# Allegro board BBear_balance_carv2_0.brd
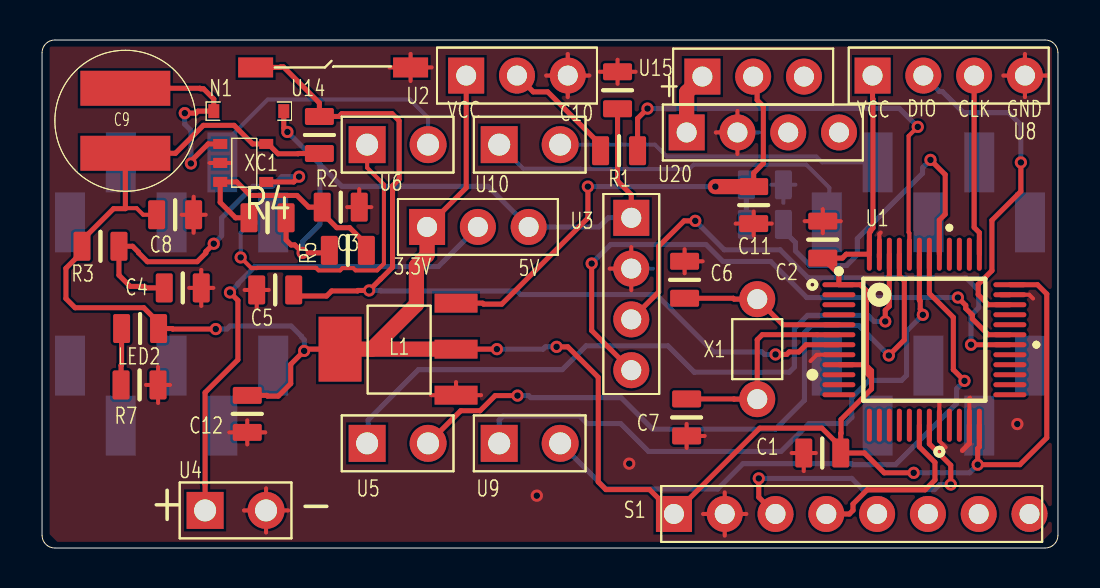
[diagram p0: board, top side]
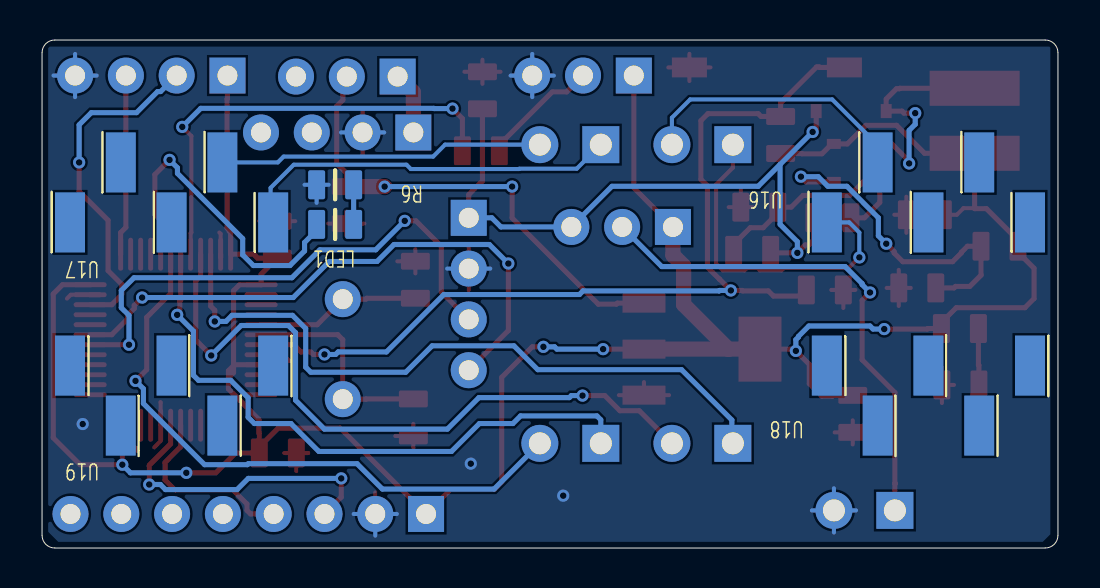
[diagram p1: board, bottom side, seen from below]

Outline 50.8 x 25.4 mm; copper layers: TOP, BOTTOM. Coordinates in mm from the lower left corner of the outline.
Outline path: 0,24.77 arc(0.19,25.21) 0.63,25.4 50.16,25.4 arc(50.61,25.21) 50.8,24.77 50.8,0.63 arc(50.61,0.19) 50.16,0 0.63,0 arc(0.19,0.19) 0,0.63 0,24.77

## Placement (name value [footprint] x y rotation side)
C1  0.1UF  [C-0805]  39.01 4.75 0 top
C2  0.1UF  [C-0805]  39.04 15.42 270 top
C3  CFB1000pF  [C-0805]  15.29 14.88 0 top
C4  CSS0.1uF  [C-0805]  7.04 13 0 top
C5  1UF  [C-0805]  11.66 12.9 0 top
C6  22PF  [C-0805]  32.13 13.41 270 top
C7  22PF  [C-0805]  32.23 6.53 90 top
C8  CIN4.7uF  [C-0805]  6.65 16.66 0 top
C9  L_4.7uH  [CD43]  4.17 21.36 180 top
C10  CL4.7uF  [C-0805]  28.78 22.89 90 top
C11  0.1UF  [C-0805]  35.59 17.14 270 top
C12  10UF  [C-0805]  10.26 6.71 90 top
L1  LM1117  [LM1117_3_3]  20.7 12.24 180 top
LED1  HEARTLED  [C-0805]  36.14 16.18 0 bottom
LED2  POWER  [C-0805]  4.9 10.97 0 top
N1  SD_XBS104S14R  [SOD-123]  10.34 21.84 0 top
R1  10K  [C-0805]  28.85 19.86 0 top
R2  10K  [C-0805]  13.87 20.65 90 top
R3  RSS220K  [C-0805]  2.92 15.09 0 top
R4  RFB1_300K  [C-0805]  11.28 16.51 0 top
R5  RFB2_75K  [C-0805]  14.94 17.04 180 top
R6  1K  [C-0805]  36.14 18.16 0 bottom
R7  1K  [C-0805]  4.88 8.15 0 top
S1  MPU6050  [CON8]  31.6 1.7 90 top
U1  STM32F103C8T6  [NCU100_LQFP_48]  44.12 10.41 0 top
U2  BOOT0  [CON3]  21.21 23.62 90 top
U3  -  [CON4]  29.46 16.51 0 top
U4  CON2  [CON2_R2_54]  8.15 1.88 90 top
U5  CON2  [CON2_R2_54]  16.26 5.23 90 top
U6  MOTOR-A  [CON2_R2_54]  16.26 20.17 90 top
U8  SWD  [CON4]  41.53 23.62 90 top
U9  CON2  [CON2_R2_54]  22.86 5.23 90 top
U10  MOTOR-B  [CON2_R2_54]  22.86 20.17 90 top
U12  switch  [CON3]  19.25 16.05 90 top
U14  CON2  [3_6KEY]  14.55 24.03 0 top
U15  KEY  [CON3]  33.02 23.57 90 top
U16  CON5  [TP2_54_5]  6.48 17.78 270 bottom
U17  CON5  [TP2_54_5]  44.32 17.78 270 bottom
U18  CON5  [TP2_54_5]  6.48 7.62 90 bottom
U19  CON5  [TP2_54_5]  44.32 7.62 90 bottom
U20  -  [CON4]  32.23 20.78 90 top
X1  -  [XTAL]  35.76 7.44 90 top
XC1  -  [XC9119]  10.06 19.25 270 top

## Library data of the parts
C1 C2 C5-C7 C11 C12 = CAP: Tolerance: RichardLC; User Part Number: pn
C3 C4 C8 C10 = CAP NP: Tolerance: RichardLC; User Part Number: pn
C9 = CDRH104R_330uH
L1 = LM1117
LED1 LED2 = LED: Tolerance: RichardLC; User Part Number: pn
N1 = 1N5819
R1-R7 = R: Tolerance: RichardLC; User Part Number: pn
S1 = CON8
U1 = STM32F103C8T6: User Part Number: pn; Tolerance: RichardLC
U2 U12 U15 = CON3
U3 U8 U20 = CON4
U4-U6 U9 U10 U14 = CON2
U16-U19 = CON5
X1 = XTAL
XC1 = XC9119

## Footprints (pads in the part's own frame, mm; a bottom-side part is the same pattern mirrored in y, then rotated)
3_6KEY
  rect 1.75x1 smd: 1(-3.875,0) 2(3.875,0)
C-0805
  custom 0.848x1.448 smd: 1(-0.925,0) 2(0.925,0)
CD43
  rect 4.5x1.75 smd: 1(0,1.625) 2(0,-1.625)
CON2_R2_54
  rect 1.849x1.849 hole 1.1: 1(0,0)
  round 1.849 hole 1.1: 2(0,-3.048)
CON3
  rect 1.8x1.8 hole 1: 1(0,0)
  round 1.8 hole 1: 2(0,-2.54) 3(0,-5.08)
CON4
  rect 1.8x1.8 hole 1: 1(0,0)
  round 1.8 hole 1: 2(0,-2.54) 3(0,-5.08) 4(0,-7.62)
CON8
  rect 1.8x1.8 hole 1: 1(0,0)
  round 1.8 hole 1: 2(0,-2.54) 3(0,-5.08) 4(0,-7.62) 5(0,-10.16) 6(0,-12.7) 7(0,-15.24) 8(0,-17.78)
LM1117_3_3
  rect 2.15x0.95 smd: 1(0,0) 2(0,2.3) 3(0,4.6)
  rect 2.15x3.25 smd: 4(5.8,2.3)
NCU100_LQFP_48
  oval 1.651x0.249 smd: 1(-4.275,2.75) 2(-4.275,2.25) 3(-4.275,1.75) 4(-4.275,1.25) 5(-4.275,0.75) 6(-4.275,0.25) 7(-4.275,-0.25) 8(-4.275,-0.75) 9(-4.275,-1.25) 10(-4.275,-1.75) 11(-4.275,-2.25) 12(-4.275,-2.75) 25(4.275,-2.75) 26(4.275,-2.25) 27(4.275,-1.75) 28(4.275,-1.25) 29(4.275,-0.75) 30(4.275,-0.25) 31(4.275,0.25) 32(4.275,0.75) 33(4.275,1.25) 34(4.275,1.75) 35(4.275,2.25) 36(4.275,2.75)
  oval 0.249x1.651 smd: 13(-2.75,-4.275) 14(-2.25,-4.275) 15(-1.75,-4.275) 16(-1.25,-4.275) 17(-0.75,-4.275) 18(-0.25,-4.275) 19(0.25,-4.275) 20(0.75,-4.275) 21(1.25,-4.275) 22(1.75,-4.275) 23(2.25,-4.275) 24(2.75,-4.275) 37(2.75,4.275) 38(2.25,4.275) 39(1.75,4.275) 40(1.25,4.275) 41(0.75,4.275) 42(0.25,4.275) 43(-0.25,4.275) 44(-0.75,4.275) 45(-1.25,4.275) 46(-1.75,4.275) 47(-2.25,4.275) 48(-2.75,4.275)
SOD-123
  rect 0.55x0.7 smd: 1(-1.75,0) 2(1.75,0)
TP2_54_5
  rect 3x1.5 smd: 1(1.5,5.08) 2(1.5,0) 3(1.5,-5.08) 4(-1.5,2.54) 5(-1.5,-2.54)
XC9119
  rect 0.5x0.7 smd: 1(-0.95,-1.15) 2(0,-1.15) 3(0.95,-1.15) 4(0.95,1.15) 5(-0.95,1.15)
XTAL
  round 1.8 hole 1: 1(0,0) 2(5,0)

## Nets
GND: C1.1 C2.1 C4.2 C5.1 C6.1 C7.1 C8.2 C10.2 C11.2 C12.1 L1.3(GND) R5.1 R6.2 R7.2 S1.2 U1.8(VSSA) U1.20(PB2/BOOT1) U1.23(VSS_1) U1.35(VSS_2) U1.47(VSS_3) U2.3 U3.2 U4.2 U8.4 U14.2 U20.2 XC1.2(VSS)
VCC3.3: C1.2 C2.2 C8.1 C9.1 C12.2 L1.2(OUT2) L1.4(OUT1) LED2.2 R2.1 R3.1 S1.1 U1.1(VBAT) U1.9(VDDA) U1.24(VDD_1) U1.36(VDD_2) U1.48(VDD_3) U2.1 U8.1 U12.1 XC1.5(VDD)
BAT+: U15.1 U20.1
BAT_5V: C3.1 C10.1 N1.2 R4.2 U3.1 U12.3
BOOT0: R1.2 U1.44(BOOT0)
HEART_LED: LED1.2 U1.41(PB5)
LEFT_BACK: U1.43(PB7) U9.1
LEFT_FOR: U1.42(PB6) U9.2
MOTOR_BAT: U4.1 U12.2
MOTORA+: U6.1 U16.3
MOTORA-: U6.2 U16.5
MOTORB+: U10.1 U17.1
MOTORB-: U10.2 U17.4
OSCIN: C6.2 U1.5(OSCIN) X1.2
OSCOUT: C7.2 U1.6(OSCOUT) X1.1
PA9: U1.31(PA10) U3.4
PA10: U1.30(PA9) U3.3
RESET: C5.2 R2.2 U1.7(NRST) U14.1
RIGHT_BACK: U1.46(PB9) U5.1
RIGHT_FOR: U1.45(PB8) U5.2
SCL: S1.3 U1.19(PB1)
SDA: S1.4 U1.18(PB0)
SWCLK: U1.37(SWCLK) U8.3
SWIO: U1.34(SWIO) U8.2
N00802: C11.1 L1.1(VCC-IN) U15.2
N03806: LED2.1 R7.1
N07785: LED1.1 R6.1
N28892: C4.1 R3.2 XC1.4(CE/SS)
N28953: C9.2 N1.1 XC1.1(LX)
N29036: C3.2 R4.1 R5.2 XC1.3(FB)
N073361: R1.1 U2.2

Pads without a net: S1 5 6 7 8; U1 2 3 4 10 11 12 13 14 15 16 17 21 22 25 26 27 28 29 32 33 38 39 40; U15 3; U16 1 2 4; U17 2 3 5; U18 1 2 3 4 5; U19 1 2 3 4 5; U20 3 4

## Via types
v1: diameter 0.61, hole 0.33, TOP to BOTTOM, 36 vias

## Routing (per net, layer and track width the routed paths; a pad name or vN(x,y) marks a point on that pad's centre or on a via; arc(x,y) is an arc through that point)
GND: length 95.8
  TOP w0.203: 25.21,23.62 26.29,23.62 ; 26.29,23.62 27.37,23.62 ; 26.29,23.62 26.29,22.54 ; 26.29,23.62 26.29,24.7 ; C5.1 11.34,12.9 ; C5.1 10.73,12 ; C5.1 10.13,12.9 ; 8.38,19.25 XC1.2 9.44,19.25 ; 32.23,5 C7.1 ; C7.1 32.23,6.21 ; C7.1 33.13,5.6 ; 7.96,12.1 C4.2 ; C4.2 8.56,13 ; C4.2 7.36,13 ; C4.2 7.96,13.91 ; C1.1 38.69,4.75 ; C1.1 37.49,4.75 ; C1.1 38.09,3.85 ; U20.2 34.77,21.86 ; U20.2 34.77,19.7 ; U20.2 33.69,20.78 ; 7.58,15.76 C8.2 ; C8.2 6.98,16.66 ; C8.2 7.58,17.56 ; C8.2 8.18,16.66 ; 17.38,24.03 U14.2 ; U14.2 18.43,23.35 ; U14.2 19.48,24.03 ; U14.2 18.43,24.71 ; 29.46,12.89 U3.2 ; U3.2 28.39,13.97 ; U3.2 29.46,15.05 ; U1.35 49.36,12.66 49.56,12.47 ; U4.2 11.2,2.98 ; U4.2 11.2,0.78 ; U4.2 10.1,1.88 ; U4.2 12.3,1.88 ; 49.15,23.62 49.15,24.7 ; 49.15,23.62 50.23,23.62 ; 49.15,23.62 48.07,23.62 ; 49.15,23.62 49.15,22.54 ; 32.13,13.73 C6.1 ; C6.1 33.03,14.34 ; C6.1 32.13,14.94 ; 35.59,15.62 C11.2 ; C11.2 34.68,16.22 ; C11.2 36.49,16.22 ; C11.2 35.59,16.82 ; 39.04,15.74 C2.1 ; C2.1 39.94,16.34 ; C2.1 38.14,16.34 ; C2.1 39.04,16.95 ; R5.1 15.86,17.95 ; R5.1 16.46,17.04 ; R5.1 15.26,17.04 ; 44.88,7.29 44.87,7.28 U1.20 44.87,5.35 45.19,5.03 ; 41.94,15.77 41.87,15.71 U1.47 ; L1.3 21.95,7.64 ; L1.3 19.45,7.64 ; L1.3 20.7,8.3 ; 10.26,5.18 C12.1 ; C12.1 10.26,6.38 ; C12.1 11.16,5.78 ; C12.1 9.36,5.78 ; C10.2 29.68,23.81 ; C10.2 27.88,23.81 ; C10.2 28.78,23.21 ; C10.2 28.78,24.41 ; 46.41,7.52 46.37,7.48 U1.23 ; R7.2 5.8,9.06 ; R7.2 5.2,8.15 ; R7.2 5.8,7.25 ; R7.2 6.4,8.15 ; 34.14,0.62 S1.2 ; S1.2 35.22,1.7 ; S1.2 34.14,2.78 ; S1.2 33.06,1.7 ; U1.8 38.75,9.66 38.43,9.35
  TOP w0.254: 41.87,14.54 U1.47 ; 47.94,12.66 U1.35 ; 46.02,4.88 46.37,5.22 U1.23 ; C7.1 31.93,5.6
  BOTTOM w0.203: U4.2 11.2,2.98 ; U4.2 11.2,0.78 ; U4.2 10.1,1.88 ; U4.2 12.3,1.88 ; 49.15,22.54 49.15,23.62 ; 49.15,23.62 48.07,23.62 ; 49.15,23.62 49.15,24.7 ; 49.15,23.62 50.23,23.62 ; 34.14,0.62 S1.2 ; S1.2 35.22,1.7 ; S1.2 33.06,1.7 ; 36.47,18.16 R6.2 ; R6.2 37.67,18.16 ; R6.2 37.07,17.26 ; 33.69,20.78 U20.2 35.85,20.78 ; 26.29,23.62 26.29,24.7 ; 26.29,23.62 25.21,23.62 ; 26.29,23.62 26.29,22.54 ; 26.29,23.62 27.37,23.62 ; 28.39,13.97 U3.2 30.54,13.97
  vias: v1(24.74,2.62) v1(29.36,4.22) v1(48.77,6.2)
VCC3.3: length 139.1
  TOP w0.203: C8.1 5.05,16.66 4.72,16.99 4.19,16.99 4.17,16.97
  TOP w0.254: 39.94,5.05 C1.2 41.12,4.75 42.11,3.76 v1(43.59,3.76) ; 39.94,5.05 39.94,5.73 39.95,5.74 39.95,6.43 41.48,7.95 41.48,8.51 ; 39.94,5.05 38.99,5.99 35.89,5.99 S1.1 30.38,2.92 28.19,2.92 27.81,3.3 27.81,8.53 26.29,10.06 v1(25.73,10.06) ; 41.48,8.51 41.22,8.76 41.22,12.86 40.92,13.16 U1.1 39.84,13.69 C2.2 40.02,14.49 40.21,14.69 U1.48 41.37,15.77 41.44,15.84 41.44,15.89 41.55,16 41.55,22.45 41.53,22.47 U8.1 41.53,23.77 ; 41.48,8.51 41.48,8.86 41.18,9.16 U1.9 ; L1.4 13.19,9.94 v1(13.11,9.86) 12.43,9.18 12.43,8.22 11.81,7.59 11.28,7.59 11.24,7.63 C12.2 ; v1(8.69,10.95) 6.53,10.95 6.51,10.97 LED2.2 5.83,11.27 5.09,12.01 1.65,12.01 1.19,12.47 1.19,13.99 2,14.79 R3.1 2,15.39 3.58,16.97 4.17,16.97 C9.1 6.67,19.74 8.07,21.13 9.6,21.13 10.53,20.2 XC1.5 11.31,20.2 11.8,19.71 12.8,19.71 12.82,19.73 R2.1 ; U1.36 49.78,13.16 50.24,12.7 50.24,5.51 48.9,4.17 v1(46.79,4.17) 46.79,4.98 46.87,5.06 U1.24 ; U2.1 21.21,18.01 U12.1 ; L1.2 v1(22.74,9.94)
  TOP w0.762: 16.48,9.94 L1.2 ; 16.48,9.94 L1.4 ; 16.48,9.94 18.72,12.18 18.72,14.11 19.25,14.64 U12.1
  BOTTOM w0.254: v1(22.74,9.94) 25.06,9.94 25.17,10.06 v1(25.73,10.06) ; v1(43.59,3.76) 46.38,3.76 v1(46.79,4.17) ; v1(13.11,9.86) 13.11,10.41 12.98,10.54 12.98,10.58 12.46,11.1 9.4,11.1 9.25,10.95 v1(8.69,10.95)
BAT+: length 3.1
  TOP w0.762: U15.1 32.23,22.78 U20.1
BAT_5V: length 34.6
  TOP w0.254: N1.2 12.09,20.98 v1(12.27,20.8) ; C10.1 28.78,18.35 29.46,17.66 U3.1 ; C3.1 14.24,14.76 v1(13.03,14.76) 12.63,15.15 12.46,15.15 12.2,15.41 R4.2
  BOTTOM w0.254: U3.1 28.31,16.51 27.85,16.05 U12.3 22.3,18.08 14.99,18.08 13.89,19.18 ; v1(13.03,14.76) 13.03,15.32 13.89,16.18 13.89,19.18 ; v1(12.27,20.8) 13.89,19.18
BOOT0: length 22.8
  TOP w0.203: U1.44 43.37,15.74 43.33,15.78 43.33,20.6 v1(43.79,21.06)
  TOP w0.254: v1(30.28,21.97) 29.78,21.47 R1.2
  BOTTOM w0.254: v1(30.28,21.97) 31.2,21.97 31.21,21.98 42.86,21.98 v1(43.79,21.06)
HEART_LED: length 16.6
  TOP w0.254: v1(44.42,19.41) 45.16,18.67 45.16,16.69 44.87,16.4 U1.41
  BOTTOM w0.254: v1(44.42,19.41) 44.03,19.01 44.03,18.73 40.77,15.47 40.77,14.66 40.23,14.12 38.4,14.12 37.67,14.85 37.67,15.28 37.07,15.88 LED1.2
LEFT_BACK: length 31
  TOP w0.254: v1(44.04,11.66) 44.04,11.8 43.91,11.93 43.91,12.35 43.87,12.39 U1.43
  BOTTOM w0.254: U9.1 22.86,6.41 23.05,6.6 26.87,6.6 27.25,6.22 28.93,6.22 30.33,4.83 36.96,4.83 38.35,6.22 40.18,6.22 40.49,6.53 40.49,7.51 41.36,8.38 42.98,8.38 43.23,8.64 43.23,10.85 v1(44.04,11.66)
LEFT_FOR: length 30.9
  TOP w0.254: U1.42 44.37,12.73 45.57,11.53 45.57,8.92 v1(46.13,8.36)
  BOTTOM w0.254: v1(46.13,8.36) 45.73,7.96 45.73,7.22 42.67,4.17 40.54,4.17 40.49,4.22 35.05,4.22 33.78,2.95 28.19,2.95 U9.2
MOTOR_BAT: length 25.5
  TOP w0.254: U4.1 8.15,3.2 8.13,3.23 8.15,3.25 8.15,7.77 9.79,9.41 9.79,12.38 v1(9.4,12.78)
  BOTTOM w0.254: v1(9.4,12.78) 9.79,13.17 9.79,13.22 10.64,14.07 19.81,14.07 U12.2
MOTORA+: length 17.1
  TOP w0.203: U6.1 16.26,19.01 17.09,18.18 17.09,14.22 16.76,13.88 15.68,13.88 15.56,14 15.02,14 14.91,13.88 13.83,13.88 13.71,14 13.7,14 13.68,14.01 10.75,14.01 10.74,14 10.46,14 v1(9.93,14.53)
  BOTTOM w0.203: 11.56,16.28 10.44,16.28 9.93,15.77 v1(9.93,14.53)
MOTORA-: length 14.1
  BOTTOM w0.203: 8.89,19.28 8.89,19.41 ; 8.89,19.41 U16.5 ; 8.89,19.41 8.89,20.03 11.29,22.43 18.39,22.43 19.3,21.51 U6.2
MOTORB+: length 19.4
  BOTTOM w0.203: U10.1 24.06,18.96 26.93,18.96 26.95,18.95 32.36,18.95 32.58,19.16 38.21,19.16 39.37,18.01 39.37,16.41 39.24,16.28
MOTORB-: length 16.5
  BOTTOM w0.203: 42.04,19.28 U17.4 39.01,19.28 38.72,19.57 31.24,19.57 30.65,20.17 U10.2
OSCIN: length 8.3
  TOP w0.254: C6.2 34.57,12.49 34.61,12.44 X1.2 37.04,11.16 U1.5
OSCOUT: length 10.7
  TOP w0.254: U1.6 38.77,10.66 38.76,10.67 36.02,10.67 35.76,10.41 X1.1 34.61,7.44 34.6,7.45 C7.2
PA9: length 29.5
  TOP w0.254: U1.31 47.32,10.66 46.52,11.46 46.52,11.64 46.19,11.97 46.19,12.13 v1(45.8,12.52) ; v1(27.48,14.22) 27.48,10.87 U3.4
  BOTTOM w0.254: v1(45.8,12.52) 38.24,12.52 36.44,14.33 34.05,14.33 33.2,15.17 28.43,15.17 v1(27.48,14.22)
PA10: length 27
  TOP w0.254: v1(32.66,16.36) 32.11,16.36 30.84,15.09 30.84,12.8 U3.3 ; U1.30 v1(46.45,10.16)
  BOTTOM w0.254: v1(46.45,10.16) 46.45,11.63 46.84,12.01 46.84,12.88 46.2,13.51 38.3,13.51 36.91,14.91 34.11,14.91 v1(32.66,16.36)
RESET: length 47
  TOP w0.254: v1(36.68,9.68) 37.24,9.68 37.36,9.8 37.84,9.8 38.21,10.16 U1.7 ; C5.2 12.89,12.6 14.23,12.6 14.48,12.85 15.77,12.85 15.8,12.88 v1(16.36,12.88) 16.93,13.45 16.93,13.45 17.53,14.04 17.53,18.11 17.86,18.44 17.86,21.36 17.5,21.72 14.99,21.72 14.85,21.58 R2.2 13.87,22.25 12.07,24.05 11.94,24.05 11.91,24.03 U14.1
  BOTTOM w0.254: v1(16.36,12.88) 16.92,12.88 16.94,12.85 23.75,12.85 23.93,12.67 30.71,12.67 33.58,9.8 35.99,9.8 36.12,9.68 v1(36.68,9.68)
RIGHT_BACK: length 35
  TOP w0.254: v1(42.16,11.33) 42.16,11.89 42.37,12.09 42.37,13.61 42.37,13.61 U1.46
  BOTTOM w0.254: U5.1 16.31,5.28 16.31,6.4 18.82,8.92 26.01,8.92 27.2,10.11 31.29,10.11 32.61,8.79 37.36,8.79 37.62,9.04 37.62,10.97 38.28,11.63 41.3,11.63 41.61,11.33 v1(42.16,11.33)
RIGHT_FOR: length 35
  TOP w0.254: v1(42.34,9.63) 43.12,10.4 43.12,13.36 42.87,13.61 U1.45 ; v1(23.77,7.62) 22.66,7.62 21.9,6.86 20.93,6.86 U5.2
  BOTTOM w0.254: v1(42.34,9.63) 40.84,11.13 38.48,11.13 38.13,10.77 38.13,7.39 36.68,5.94 30.53,5.94 28.96,7.52 24.43,7.52 24.33,7.62 v1(23.77,7.62)
SCL: length 15.5
  TOP w0.254: v1(35.84,3.48) 35.84,2.54 S1.3 ; U1.19 44.37,5.21 45.44,4.14 v1(45.44,3.17)
  BOTTOM w0.254: v1(35.84,3.48) 40.49,3.48 41.05,2.92 44.63,2.92 44.88,3.17 v1(45.44,3.17)
SDA: length 9.4
  TOP w0.254: S1.4 40.37,1.7 40.55,1.88 40.55,2.2 41.26,2.91 44.16,2.91 44.65,3.4 44.65,4.28 43.87,5.06 U1.18
SWCLK: length 9.2
  TOP w0.254: 46.61,23.77 46.61,16.03 46.87,15.77 U1.37
SWIO: length 17.1
  TOP w0.254: U1.34 47.32,12.16 46.81,12.67 46.81,13.18 47.5,13.87 47.5,16.38 48.95,17.83 v1(48.95,19.28)
  BOTTOM w0.254: v1(48.95,19.28) 48.95,21.16 48.34,21.77 46.08,21.77 45.02,22.82 44.87,22.82 U8.2
N00802: length 24.2
  TOP w0.254: v1(27.29,18.07) 27.29,16.5 22.99,12.19 22.08,12.19 22.03,12.24 L1.1 ; U15.2 35.76,23.37 35.76,22.4 36.07,22.09 36.07,19.23 35.59,18.75 C11.1
  TOP w0.762: C11.1 v1(33.67,18.07)
  BOTTOM w0.254: v1(27.29,18.07) v1(33.67,18.07)
N03806: length 2.8
  TOP w0.254: R7.1 3.95,9.13 3.98,9.16 LED2.1
N07785: length 2
  BOTTOM w0.254: LED1.1 R6.1
N28892: length 17.4
  TOP w0.254: v1(8.59,15.21) 8.19,14.82 8.19,14.75 7.76,14.31 5.27,14.31 4.83,14.76 4.83,14.79 4.52,15.09 R3.2 3.85,13.64 4.4,13.08 5.12,13.08 5.2,13 C4.1 ; XC1.4 12.59,18.3 v1(12.85,18.57)
  BOTTOM w0.254: v1(8.59,15.21) 8.98,15.61 8.98,16.51 10.55,18.08 11.51,18.08 11.99,18.57 v1(12.85,18.57)
N28953: length 11.3
  TOP w0.254: v1(7.44,19.23) 7.44,19.34 8.3,20.2 XC1.1 ; v1(7.14,21.74) 7.7,21.74 7.8,21.84 N1.1 8.59,22.45 8.07,22.96 7.92,22.96 7.9,22.99 C9.2
  BOTTOM w0.254: v1(7.14,21.74) 7.14,21.18 7.44,20.88 v1(7.44,19.23)
N29036: length 11.9
  TOP w0.254: R4.1 9.68,16.51 8.91,17.28 XC1.3 9.74,18.3 10.41,17.63 12.75,17.63 13.33,17.04 R5.2 14.01,16.74 14.74,16.01 15.39,16.01 16.22,15.18 C3.2
N073361: length 5.9
  TOP w0.254: 23.75,23.62 24.57,22.81 25.29,22.81 27.93,20.16 R1.1

## Copper pours and planes (outline as drawn; the poured copper is in the pictures)
GND on TOP: 0.76,0.31 0.38,0.69 0.38,25.02 0.43,25.07 50.42,25.07 50.49,24.99 50.49,0.81 49.99,0.31 ; 5 cut-outs
GND on BOTTOM: 0.76,0.31 0.38,0.69 0.38,25.02 0.43,25.07 50.42,25.07 50.49,24.99 50.49,0.81 49.99,0.31 ; 5 cut-outs

## Text on the board
Ref Des/Silkscreen Top: 3.3V | VCC | 5V | DIO | CLK | GND | + | -
COMPVAL_TYPE_TOP: FIGURE | SIZE | 13.0 | 39.37 | 43.3 | DRILL CHART: TOP to BOTTOM | ALL UNITS ARE IN MILS | PLATED | QTY | 36 | 31 | 10
